# Altium PCB T962aAlt.PcbDoc
Units mm, origin at the board's own origin, x right, y up, seen from the top; angles counter-clockwise.
Board outline 75 x 55 mm, 2 copper layers (Top Layer, Bottom Layer); 50 components, 63 nets, 223 pads, 0 vias.
Unrouted connection lines stored in the file: 71.
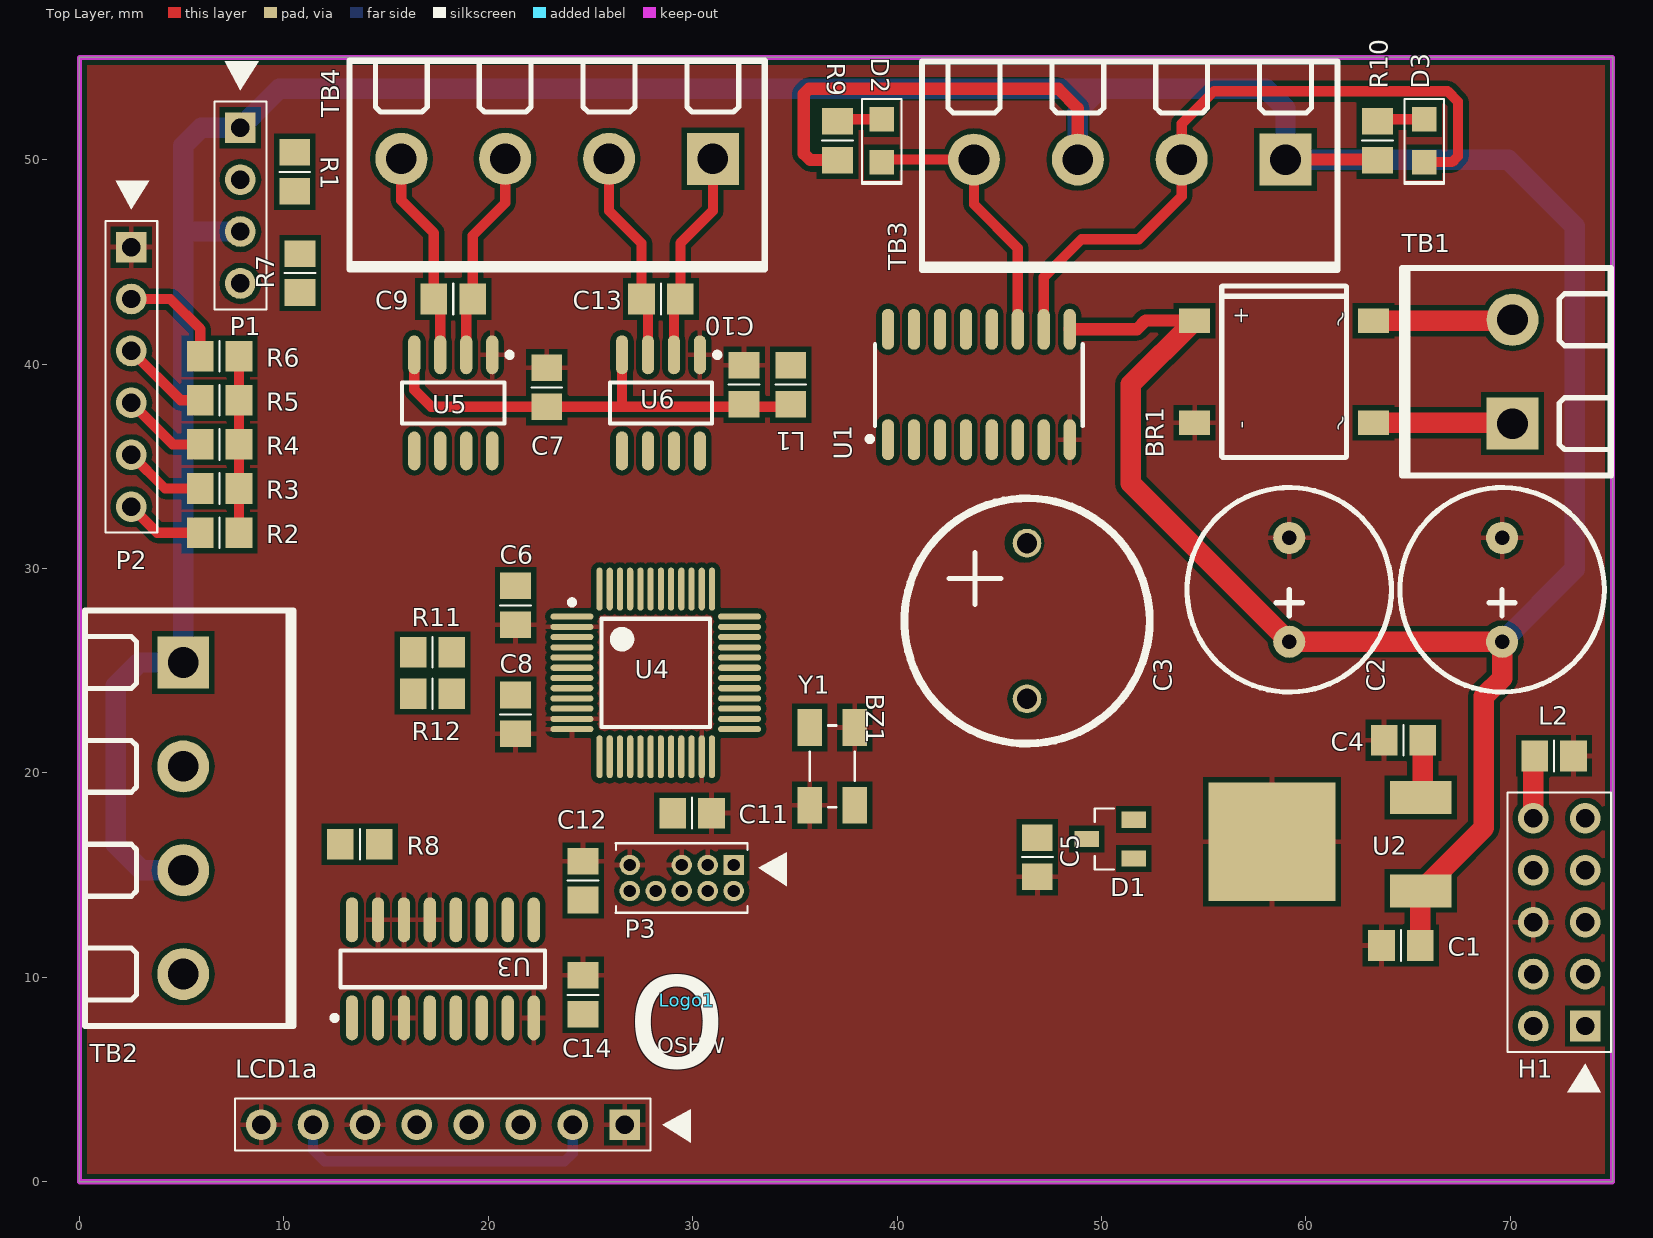
[diagram p0: Top Layer view]
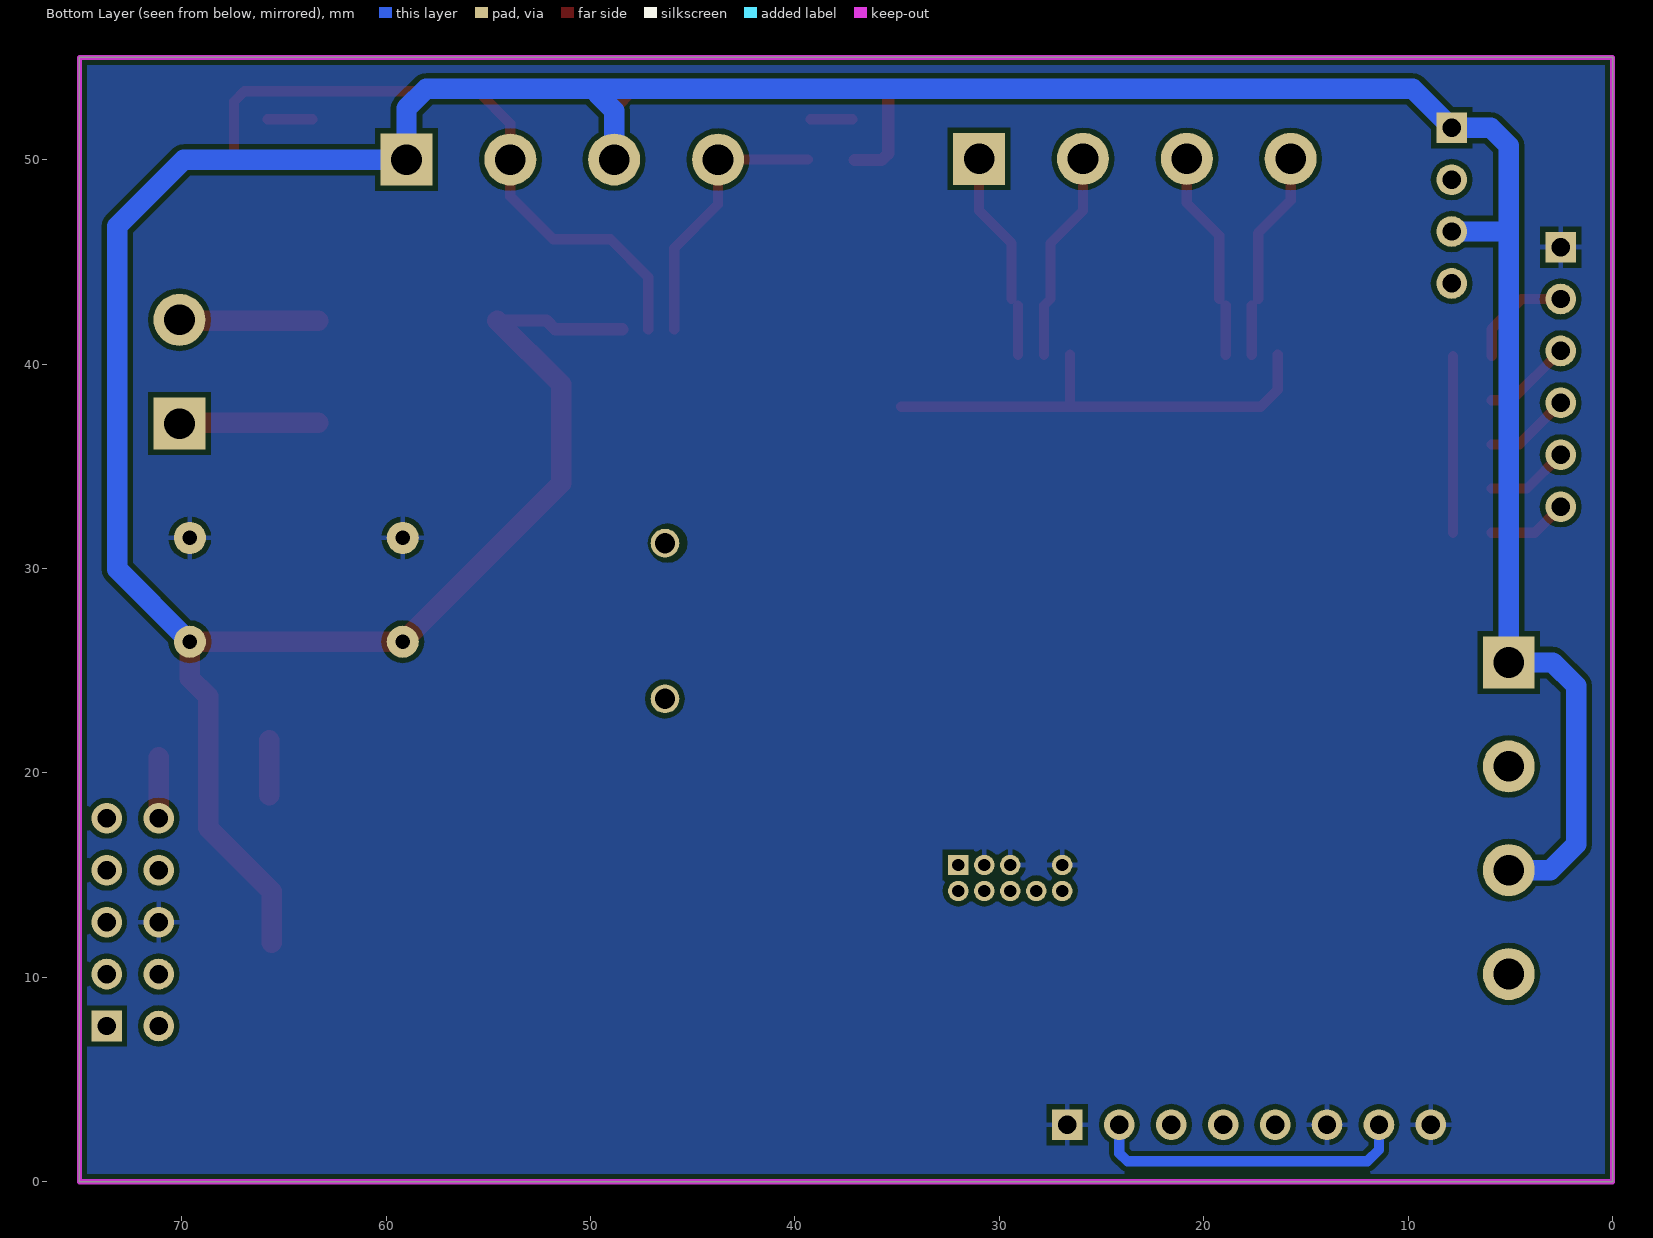
[diagram p1: Bottom Layer view, seen from below]

## Layer stack, top to bottom
Top Solder: solder mask 0.0102, Solder Resist, Dk 3.5
Top Layer: signal copper 0.0356
Dielectric 1: dielectric 0.32, FR-4, Dk 4.8
Bottom Layer: signal copper 0.0356
Bottom Solder: solder mask 0.0102, Solder Resist, Dk 3.5

## Board outline
0,0 75,0 75,55 0,55

## Design rules (kind name [scope] priority, off if disabled: settings)
Clearance [All] p1: gap=0.254
PolygonConnect [All] p1: connectstyle=Relief reliefconductorwidth=0.254 reliefentries=4 polygonreliefangle="90 Angle" airgapwidth=0.254
RoomDefinition T962a-P1 [InComponentClass('T962a-P1')] p1: confinementstyle=ConfineIn formatcopy=TRUE lockcomponents=FALSE outline -1.015,-0.805 61,-0.805 61,56.64 -1.015,56.64
RoutingVias [All] p1: holewidth=0.711 width=1.27 viastyle="Through Hole" minholewidth=0.711 minwidth=1.27 maxholewidth=0.711 maxwidth=1.27
SolderMaskExpansion [All] p1: expansion=0.102
Width [All] p1: maxlimit=2 minlimit=0.3 preferedwidth=0.6
30 further rules are at their usual default settings.

## Components (designator, comment, footprint, x,y, rotation, side; value= is the part's Value field where it differs from the comment)
BR1 "DF10S" Bridge-SMT 58.928,39.624 r90 top
BZ1 "Buzzer_PCB (Adafruit)" BUZZER_SMALL 46.355,27.432 r90 top
C1 "100nF" CCNP2012-0805 64.643,11.557 r0 top
C2 "470uF/25V" RB5/10x13mm 69.596,26.416 r90 top
C3 "470uF/25V" RB5/10x13mm 59.182,26.416 r90 top
C4 "4u7/10V" CCNP2012-0805 64.77,21.59 r0 top
C5 "100nF" CCNP2012-0805 46.863,15.875 r90 top
C6 "2u2F" CCNP2012-0805 21.336,28.194 r90 top
C7 "100nF" CCNP2012-0805 22.86,38.862 r270 top
C8 "2u2F/6V" CCNP2012-0805 21.336,22.86 r90 top
C9 "10nF" CCNP2012-0805 18.288,43.18 r180 top
C10 "100nF" CCNP2012-0805 32.512,38.989 r270 top
C11 "100nF" CCNP2012-0805 29.972,18.034 r180 top
C12 "100nF" CCNP2012-0805 24.638,14.732 r270 top
C13 "10nF" CCNP2012-0805 28.448,43.18 r180 top
C14 "100nF" CCNP2012-0805 24.638,9.144 r270 top
D1 "PMEG2005CT" SOT23 50.419,16.764 r90 top
D2 "LED Red" LED-SMT-2 39.243,50.927 r270 top
D3 "LED Red" LED-SMT-2 65.786,50.927 r270 top
H1 "2x5 Header" HDR2X5S 73.66,7.62 r90 top
L1 "FB" CR2012-0805 34.798,38.989 r270 top
L2 "FB" CR2012-0805 72.136,20.828 r180 top
LCD1a "Header 1x8" HDR1X8S 26.67,2.794 r180 top
Logo1 "OSHW Logo" OSHW 29.718,8.89 r0 top
P1 "Header 1x4" HDR1X4S 7.874,51.562 r270 top
P2 "Keyboard" HDR1x6S 2.54,45.72 r270 top
P3 "SWD2X5" SWD-2x5 32.004,15.494 r180 top
R1 "1K" CR2012-0805 10.541,49.403 r90 top
R2 "4K7" CR2012-0805 6.858,31.75 r0 top
R3 "4K7" CR2012-0805 6.858,33.909 r0 top
R4 "4K7" CR2012-0805 6.858,36.068 r0 top
R5 "4K7" CR2012-0805 6.858,38.227 r0 top
R6 "4K7" CR2012-0805 6.858,40.386 r0 top
R7 "1K" CR2012-0805 10.795,44.45 r270 top
R8 "DNP" CR2012-0805 13.716,16.51 r180 top
R9 "10K" CR2012-0805 37.084,50.927 r90 top
R10 "10K" CR2012-0805 63.5,50.927 r90 top
R11 "33R" CR2012-0805 17.272,25.908 r180 top
R12 "33R" CR2012-0805 17.272,23.876 r180 top
TB1 "Terminal2" MOLEX-39544-3002 70.104,37.084 r0 top
TB2 "Terminal4" MOLEX-39544-3004 5.08,25.4 r180 top
TB3 "Terminal4" MOLEX-39544-3004 59,50 r90 top
TB4 "Terminal4" MOLEX-39544-3004 30.988,50.038 r90 top
U1 "ULN2003ADR" SOIC-16 44,39 r90 top
U2 "NCP5501DT50RKG" TO-252 61.976,16.51 r90 top
U3 "SN74HCT157D" D016_N 17.78,10.414 r90 top
U4 "MK20DX128VLF5" TSQFP50P900X900-48M 28.194,24.892 r0 top
U5 "MAX31855KASA+T" SO-8_L 18.288,38.1 r270 top
U6 "MAX31855KASA+T" SO-8_L 28.448,38.1 r270 top
Y1 "ABM3B-8.000MHZ-B2-T" "Crystal_SMT - ABM3B" 36.83,20.32 r90 top

## Footprints (in the part's own frame and the unit in brackets; to place one, negate y for a bottom-side part, rotate by r counter-clockwise, add the part's x,y. Pads: shape width x height; smd on the part's side, far side on the other; paste and mask are expansions set on the pad)
Bridge-SMT [mm] "Bridge rectifier SMT"
  rect 1.2x1.52 smd: 1(2.5,4.375) 2(-2.5,4.375) 3(-2.5,-4.375) 4(2.5,-4.375)
  silkscreen extent -4.2,-3.05 4.2,3.05, body extent -4.24,-5.01 4.26,4.99, height 2.93
BUZZER_SMALL [mm] "BUZZER -  Adafruit"
  round 1.4 hole 1: 1(-3.81,0) 2(3.81,0)
  silkscreen extent -6,-6 6,6, body extent -5.99,-6 5.99,6, height 10
CCNP2012-0805 [mm]
  rect 1.3x1.5 smd: 1(-0.95,0) 2(0.95,0)
  silkscreen extent 0,-0.75 0,0.75, body extent -1,-0.62 1,0.63, height 0.78
CR2012-0805 [mm]
  rect 1.3x1.5 smd: 1(-0.95,0) 2(0.95,0)
  silkscreen extent 0,-0.75 0,0.75, body extent -1.15,-0.67 1.15,0.68, height 0.76
"Crystal_SMT - ABM3B" [mm] "Crystal SMT low profile (5.0 x 3.2 mm)"
  rect 1.8x1.2 smd: 1(-1.9,-1.1) 2(1.9,-1.1) 3(1.9,1.1) 4(-1.9,1.1)
  silkscreen extent -2,-1.1 2,1.1, body extent -2.51,-1.59 2.49,1.61, height 1.15
D016_N [mm] "SOIC, 16-Leads, Body 9.9x3.9mm, Pitch 1.27mm, IPC Medium Density"
  oval 2.2x0.6 smd: 1(-2.4,4.445) 2(-2.4,3.175) 3(-2.4,1.905) 4(-2.4,0.635) 5(-2.4,-0.635) 6(-2.4,-1.905) 7(-2.4,-3.175) 8(-2.4,-4.445) 9(2.4,-4.445) 10(2.4,-3.175) 11(2.4,-1.905) 12(2.4,-0.635) 13(2.4,0.635) 14(2.4,1.905) 15(2.4,3.175) 16(2.4,4.445)
  silkscreen extent -2.52,-5 0.9,5.42, body extent -2,-5 2,5, height 1.75
HDR1X4S [mm] "Connector; Header; 5 Position; Straight"
  rect 1.5x1.5 hole 0.9: 1(0,0)
  round 1.5 hole 0.9: 2(2.54,0) 3(5.08,0) 4(7.62,0)
  silkscreen extent -3.24,-1.27 8.89,1.27, body extent -1.27,-1.27 8.89,1.27, height 6
HDR1x6S [mm] "Connector; Header; 6 Position; Straight"
  rect 1.5x1.5 hole 0.9: 1(0,0)
  round 1.5 hole 0.9: 2(2.54,0) 3(5.08,0) 4(7.62,0) 5(10.16,0) 6(12.7,0)
  silkscreen extent -3.24,-1.27 13.97,1.27, body extent -1.27,-1.27 13.97,1.27, height 6
HDR1X8S [mm] "Connector; Header; 6 Position; Straight"
  rect 1.5x1.5 hole 0.9: 1(0,0)
  round 1.5 hole 0.9: 2(2.54,0) 3(5.08,0) 4(7.62,0) 5(10.16,0) 6(12.7,0) 7(15.24,0) 8(17.78,0)
  silkscreen extent -3.24,-1.27 19.05,1.27, body extent -1.27,-1.27 19.05,1.27, height 6
HDR2X5S [mm] "Connector; Header; 2x6 Position; Straight"
  rect 1.5x1.5 hole 0.9: 1(0,0)
  round 1.5 hole 0.9: 2(0,2.54) 3(2.54,0) 4(2.54,2.54) 5(5.08,0) 6(5.08,2.54) 7(7.62,0) 8(7.62,2.54) 9(10.16,0) 10(10.16,2.54)
  silkscreen extent -3.24,-1.27 11.43,3.81, body extent -1.27,-1.27 11.43,3.81, height 6
LED-SMT-2 [mm] "Medium SMT LED HSMx-C170 (0805)"
  rect 1.2x1.2 smd: A(-1.05,0) K(1.05,0)
  silkscreen extent -2.03,-0.96 2.13,0.96, body extent -1.78,-0.76 1.78,0.76, height 1
MOLEX-39544-3002 [mm] "Wire-To-Board Terminal Block"
  rect 2.54x2.54 hole 1.5: 1(0,0)
  round 2.54 hole 1.5: 2(0,5.08)
  silkscreen extent -5.4,-2.54 4.83,7.62, body extent -5.08,-2.54 4.83,7.62, height 14.6
MOLEX-39544-3004 [mm] "Wire-To-Board Terminal Block"
  rect 2.54x2.54 hole 1.5: 1(0,0)
  round 2.54 hole 1.5: 2(0,5.08) 3(0,10.16) 4(0,15.24)
  silkscreen extent -5.4,-2.54 4.83,17.78, body extent -5.08,-2.54 4.83,17.78, height 14.6
OSHW [mm] "OSHW Logo"
RB5/10x13mm [mil]
  round 62 hole 28: 1(0,0) 2(200,0)
  silkscreen extent -97,-197 297,197, body extent -97,-197 297,197, height 512
SO-8_L [mm] "8-Pin Small Outline Integrated Circuit 1.27 mm Pitch, IPC High Density"
  oval 1.9x0.6 smd: 1(-2.35,1.905) 2(-2.35,0.635) 3(-2.35,-0.635) 4(-2.35,-1.905) 5(2.35,-1.905) 6(2.35,-0.635) 7(2.35,0.635) 8(2.35,1.905)
  silkscreen extent -2.47,-2.5 1,2.88, body extent -3,-2.45 3,2.45, height 1.7
SOIC-16 [mm] "SOIC, 16-Leads, Body 10x4mm, Pitch 1.27mm"
  oval 2x0.6 smd: 1(-2.7,4.445) 2(-2.7,3.175) 3(-2.7,1.905) 4(-2.7,0.635) 5(-2.7,-0.635) 6(-2.7,-1.905) 7(-2.7,-3.175) 8(-2.7,-4.445) 9(2.7,-4.445) 10(2.7,-3.175) 11(2.7,-1.905) 12(2.7,-0.635) 13(2.7,0.635) 14(2.7,1.905) 15(2.7,3.175) 16(2.7,4.445)
  silkscreen extent -2.79,-5.08 1.97,5.46, body extent -3,-4.95 3,4.95, height 1.4
SOT23 [mm] "SOT-23; 3 Leads; Body 3.0 x 2.3 mm, inc. leads (LxW max)"
  rect 0.8x1.2 smd: 1(-0.95,-1.15) 2(0.95,-1.15) 3(0,1.15)
  silkscreen extent -1.5,-0.2 1.5,0.75, body extent -1.5,-1.25 1.5,1.25, height 1.05
SWD-2x5 [mm] "Connector; SWD; 2x5 Position"
  rect 1x1 hole 0.6: 1(0,0)
  round 1 hole 0.6: 2(0,1.27) 3(1.27,0) 4(1.27,1.27) 5(2.54,0) 6(2.54,1.27) 8(3.81,1.27) 9(5.08,0) 10(5.08,1.27)
  silkscreen extent -2.6,-1.06 5.77,2.33, body extent -0.63,-1.09 5.72,2.31, height 4.5
TO-252 [mm] "TO-252 Package"
  rect 1.6x3 smd: 1(-2.285,-3.64) 3(2.285,-3.64)
  rect 5.8x6.2 smd: 4(0.127,3.64)
  body extent -3.14,-4.23 3.4,5.71, height 2.29
TSQFP50P900X900-48M [mm] "Thin QFP, 48-Leads, Body 7x7mm, Pitch 0.5mm, IPC Low Density"
  oval 2.1x0.3 smd: 1(-4.1,2.75) 2(-4.1,2.25) 3(-4.1,1.75) 4(-4.1,1.25) 5(-4.1,0.75) 6(-4.1,0.25) 7(-4.1,-0.25) 8(-4.1,-0.75) 9(-4.1,-1.25) 10(-4.1,-1.75) 11(-4.1,-2.25) 12(-4.1,-2.75) 25(4.1,-2.75) 26(4.1,-2.25) 27(4.1,-1.75) 28(4.1,-1.25) 29(4.1,-0.75) 30(4.1,-0.25) 31(4.1,0.25) 32(4.1,0.75) 33(4.1,1.25) 34(4.1,1.75) 35(4.1,2.25) 36(4.1,2.75)
  oval 0.3x2.1 smd: 13(-2.75,-4.1) 14(-2.25,-4.1) 15(-1.75,-4.1) 16(-1.25,-4.1) 17(-0.75,-4.1) 18(-0.25,-4.1) 19(0.25,-4.1) 20(0.75,-4.1) 21(1.25,-4.1) 22(1.75,-4.1) 23(2.25,-4.1) 24(2.75,-4.1) 37(2.75,4.1) 38(2.25,4.1) 39(1.75,4.1) 40(1.25,4.1) 41(0.75,4.1) 42(0.25,4.1) 43(-0.25,4.1) 44(-0.75,4.1) 45(-1.25,4.1) 46(-1.75,4.1) 47(-2.25,4.1) 48(-2.75,4.1)
  silkscreen extent -4.22,-2.65 2.65,3.57, body extent -4.55,-4.5 4.45,4.5, height 1.6

## Part data
BR1: "bRIDGE rECTIFIER"
C1 C5 C6 C8 C11 C14: library part Cap, "Capacitor"
C2 C3: library part Cap-25ZLS470MEFC10X12, "Polarized Capacitor"
C4 C7 C9 C10 C12 C13: library part Cap_CCNP_0805, "Capacitor SMT 0805"
D1: "Dual Schottky Diode (SMT)"
D2 D3: library part "LED SMT,Red", "LED (Red SMT)"
H1: library part "Header 2x5", "Header 2x5"
L1 L2: library part "Ferrite Bead 0805", "Ferrite Bead (0805) 0.045OHM, 2A"
LCD1a: "Header, 10-Pin, Right Angle"
P1: "Header, 5-Pin, Right Angle"
P2: library part "Header 6", "Header, 6-Pin"
P3: "SWD Connector 2x5-Pin"
R1 R2 R3 R4 R5 R6 R7 R8 R9 R10 R11 R12: library part Res_CR0805, "Resistor"
TB1: "MULTICOMP  MC24366 Wire-To-Board Terminal Block"
TB2 TB3 TB4: "MULTICOMP MC24368 Wire-To-Board Terminal Block"
U2: "Fixed LDO Voltage Regulator, 2.5V-16V in, 230mV Dropout, 5V/500mA out, TO-252-3"
U3: "Quadruple 2-Line to 1-Line Data Selector/Multiplexer"
U4: "Arm Cortex M4"
Y1: "Crystal 8MHz (MINIATURE SMT ABM3B)"

## Nets (pads, with @x,y where several pads share a name; then routed paths per layer and width w, separated by ;. In a path a pad name is that pad's centre, name@x,y a point inside that pad or via, vN(x,y) a via of type N, cw(c..) or ccw(c..) an arc to the next point about the centre after c; other vN are vias at no path point)
3V3: C6.2 C8.2 C11.2 H1.5 L1.1 P3.1 R2.2 R3.2 R4.2 R5.2 R6.2 U4.1 U4.5 U4.9 U4.10 U4.16 U4.22 | length 8.6
  Top Layer w0.5: R2.2 R3.2 R4.2 R5.2 R6.2
5V: BZ1.2 C5.2 C14.2 D1.3 LCD1a.2 LCD1a.7 U3.2 U3.6 U3.10 U3.16 U4.6 | length 15.7
  Bottom Layer w0.5: LCD1a.7 11.43,1.57 12,1 23.733,1 24.13,1.397 LCD1a.2
5VSUP: C4.2 D1.2 U2.3 | length 2.7
  Top Layer w1: U2.3@65.72,18.899 C4.2
12V: BR1.1 C1.2 C2.1 C3.1 P1.1 P1.3 R9.1 R10.1 TB2.1 TB2.3 TB3.1 TB3.3 U1.9 U2.1 | length 221.1
  Top Layer w0.6: R9.1 35.748,49.977 35.433,50.292 35.433,53.213 35.687,53.467 47.879,53.467 48.84,52.506 TB3.3 ; U1.9 51.733,41.7 52.157,42.124 BR1.1 ; TB3.1 R10.1@63.477,50
  Top Layer w1: BR1.1 51.435,39.006 51.435,34.163 C3.1 C2.1 69.596,24.638 68.707,23.749 68.707,17.316 U2.1 ; C1.2@65.593,11.684 U2.1@65.593,14.202
  Bottom Layer w1: TB2.3 3.048,15.24 1.778,16.51 1.778,24.257 2.921,25.4 TB2.1 5.08,46.482 ; P1.3 5.08,46.482 ; TB3.3 48.84,52.396 49.657,53.213 ; C2.1 73.152,29.972 73.152,46.736 69.888,50 TB3.1 59,52.506 58.039,53.467 9.779,53.467 P1.1 5.969,51.562 5.08,50.673 5.08,46.482
BUZZER: U1.3 U4.38
BUZZERB: BZ1.1 U1.14
CASEFAN: U1.5 U4.36
CASEFANB: TB2.2 U1.12
EXTAL: U4.24 Y1.1
GND: BR1.2 C1.1 C2.2 C3.2 C4.1 C5.1 C6.1 C7.1 C8.1 C10.1 C11.1 C12.1 C14.1 H1.6 L2.1 LCD1a.1 LCD1a.6 LCD1a.8 P2.1 P3.3 P3.5 P3.9 U1.8 U2.4 U3.3 U3.8 U3.13 U3.14 U3.15 U4.2 U4.11 U4.12 U4.23 U5.1 U6.1 Y1.2 Y1.4
HEATER: U1.6 U4.35
HEATERB: D2.K TB3.4 U1.11 | length 13.6
  Top Layer w0.5: D2.K@39.366,50 TB3.4 43.76,47.807 45.905,45.662 U1.11
L_CS*: U3.1 U4.33
L_CSB: LCD1a.3 U3.4
LED1: U1.1 U4.40
LED1B: R1.1 U1.16
LED1R: P1.2 R1.2
LED2: U1.2 U4.39
LED2B: R7.1 U1.15
LED2R: P1.4 R7.2
MISO: H1.2 U4.44 U5.7 U6.7
MOSI: U3.5 U4.43
MOSIB: LCD1a.4 U3.7
NetBR1_3: BR1.3 TB1.1 | length 6.8
  Top Layer w1: BR1.3 70.064,37.124 TB1.1
NetBR1_4: BR1.4 TB1.2 | length 6.8
  Top Layer w1: BR1.4 70.064,42.124 TB1.2
NetD2_A: D2.A R9.2 | length 2.1
  Top Layer w0.5: R9.2@37.184,51.977 D2.A
NetD3_A: D3.A R10.2 | length 2.2
  Top Layer w0.5: R10.2@63.6,51.977 D3.A
OVENFAN: U1.7 U4.34
OVENFANB: D3.K TB3.2 U1.10 | length 33.3
  Top Layer w0.5: U1.10 47.175,44.254 49.022,46.101 51.816,46.101 53.92,48.205 TB3.2 53.92,51.761 55.499,53.34 66.929,53.34 67.437,52.832 67.437,50.165 67.149,49.877 D3.K
PTA4: U4.21
PTB17: U4.32
PTD7: U4.48
RESETB: C12.2 P3.10 U4.26
SCK: H1.1 U3.11 U4.42 U5.5 U6.5
SCKB: LCD1a.5 U3.9
SPARE: U1.4 U4.37
SPAREB: R8.1 U1.13
SPARER: R8.2 TB2.4
SW_F1: P2.2 R6.1 U4.30 | length 5.3
  Top Layer w0.5: P2.2 4.445,43.18 5.908,41.717 R6.1
SW_F2: P2.3 R5.1 U4.29 | length 4.4
  Top Layer w0.5: P2.3 4.953,38.227 R5.1
SW_F3: P2.4 R4.1 U4.28 | length 4.2
  Top Layer w0.5: P2.4 4.572,36.068 R4.1
SW_F4: P2.5 R3.1 U4.27 | length 4.1
  Top Layer w0.5: P2.5 4.191,33.909 R3.1
SW_S: P2.6 R2.1 U4.31 | length 3.9
  Top Layer w0.5: P2.6 3.81,31.75 R2.1
SWD_CLK: P3.4 U4.17
SWD_DIO: P3.2 U4.20
SWD_RX: P3.8 U4.18
SWD_TX: P3.6 U4.19
T1+: C9.2 TB4.4 U5.3 | length 9.9
  Top Layer w0.5: TB4.4 15.748,48.006 17.338,46.416 C9.2 ; U5.3 C9.2@17.653,42.865
T1-: C9.1 TB4.3 U5.2 | length 9.9
  Top Layer w0.5: U5.2 C9.1@18.923,42.865 ; C9.1 19.238,46.289 20.828,47.879 TB4.3
T2+: C13.2 TB4.2 U6.3 | length 10.4
  Top Layer w0.5: TB4.2 25.908,47.503 27.498,45.913 C13.2 27.813,42.865 U6.3
T2-: C13.1 TB4.1 U6.2 | length 9.9
  Top Layer w0.5: U6.2 C13.1@29.083,42.865 ; C13.1 29.398,45.908 30.988,47.498 TB4.1
T_CS1*: U4.46 U5.6
T_CS2*: U4.47 U6.6
T_CS3*: H1.3 U4.45
T_CS4*: H1.4 U4.41
USB_5V: D1.1 H1.7
USB_DM: R11.2 U4.4
USB_DMB: H1.8 R11.1
USB_DP: R12.2 U4.3
USB_DPB: H1.9 R12.1
USB_GND: H1.10 L2.2 | length 3
  Top Layer w1: H1.10 L2.2@71.12,20.762
VADC: C7.2 C10.2 L1.2 U5.4 U6.4 | length 23
  Top Layer w0.5: U5.4 16.383,38.735 17.206,37.912 C7.2 L1.2@34.798,37.912 ; 26.543,37.912 U6.4
XTAL: U4.25 Y1.3
pads on no net: U3.12 U4.7 U4.8 U4.13 U4.14 U4.15 U5.8 U6.8

## Polygon pours and split planes (outlines as drawn)
GND on Top Layer "Top Layer-usb-shield" (solid, remove dead copper, pour order 2): 0,55 75,55 75,0 0,0 0,55
GND on Bottom Layer "Top Layer-usb-shield" (solid, remove dead copper, pour order 4): 0,55 75,55 75,0 0,0 0,55

## Keep-outs
Keep-Out Layer:
  the board outline again, w0.254

## Dimensions
75,55 to 75,0 on Keep-Out Layer
0,55 to 75,55 on Keep-Out Layer

## Text inside footprints (layer, text, board x,y; h text height)
BR1: Top Overlay "-" at 57.182,36.83 h0.76 r90; Top Overlay "+" at 57.182,41.91 h0.76 r90; Top Overlay "~" at 61.801,41.656 h0.76 r65; Top Overlay "~" at 61.801,36.576 h0.76 r65
Logo1: Top Overlay "OSHW" at 28.27,6.274 h0.76; Top Overlay "o" at 31.725,3.658 h10.16